# Altium PCB Watch.PcbDoc
Units mil, origin at the board's own origin, x right, y up, seen from the top; angles counter-clockwise.
Board outline 2050 x 2000 mil, 2 copper layers (Top Layer, Bottom Layer); 22 components, 22 nets, 98 pads, 6 vias.
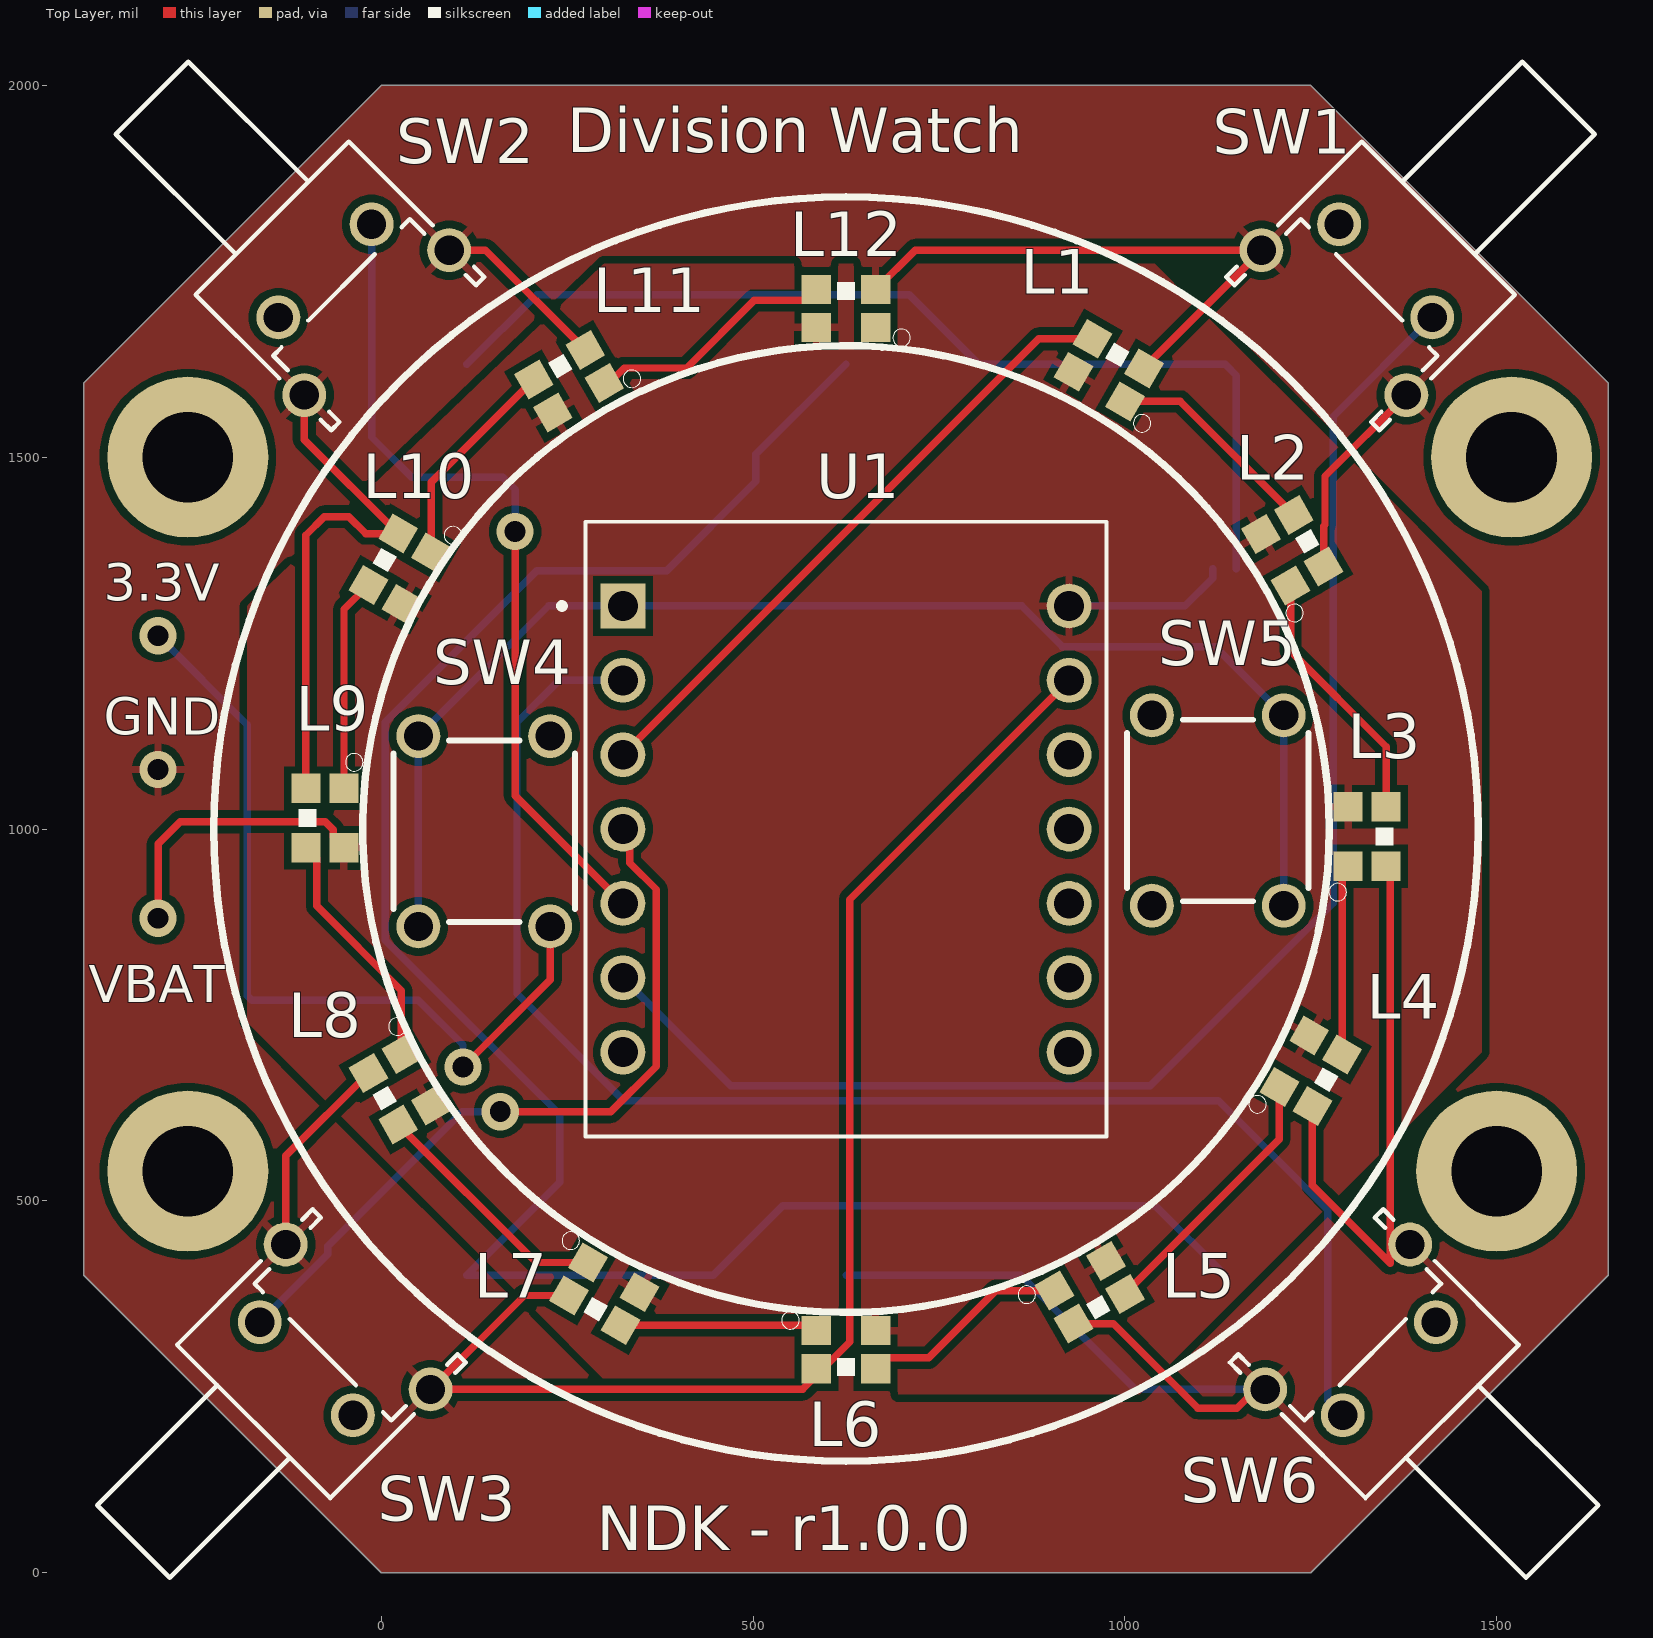
[diagram p0: Top Layer view]
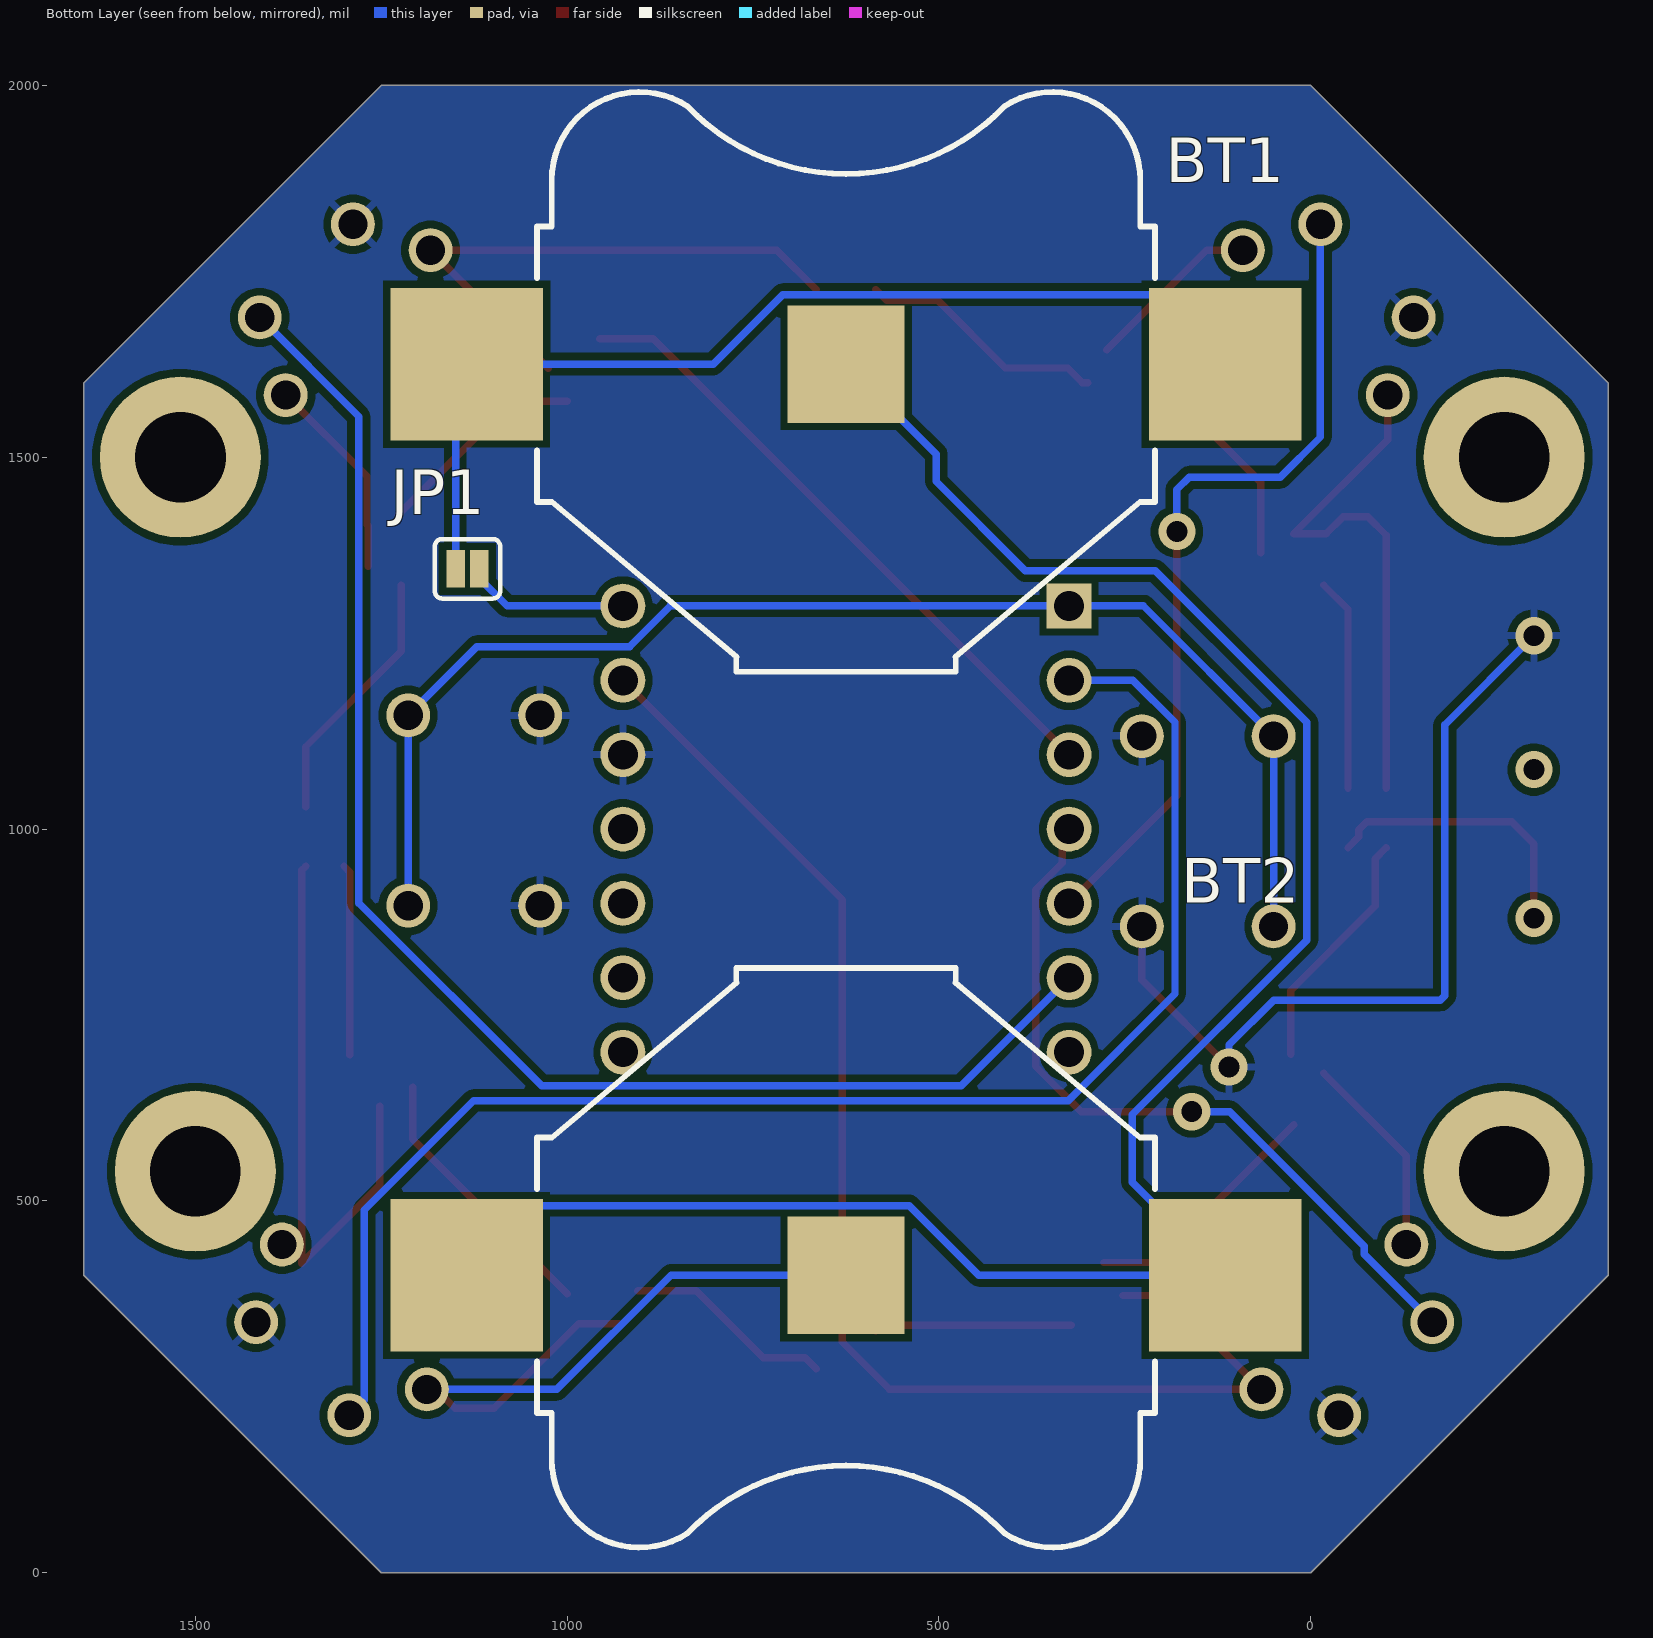
[diagram p1: Bottom Layer view, seen from below]
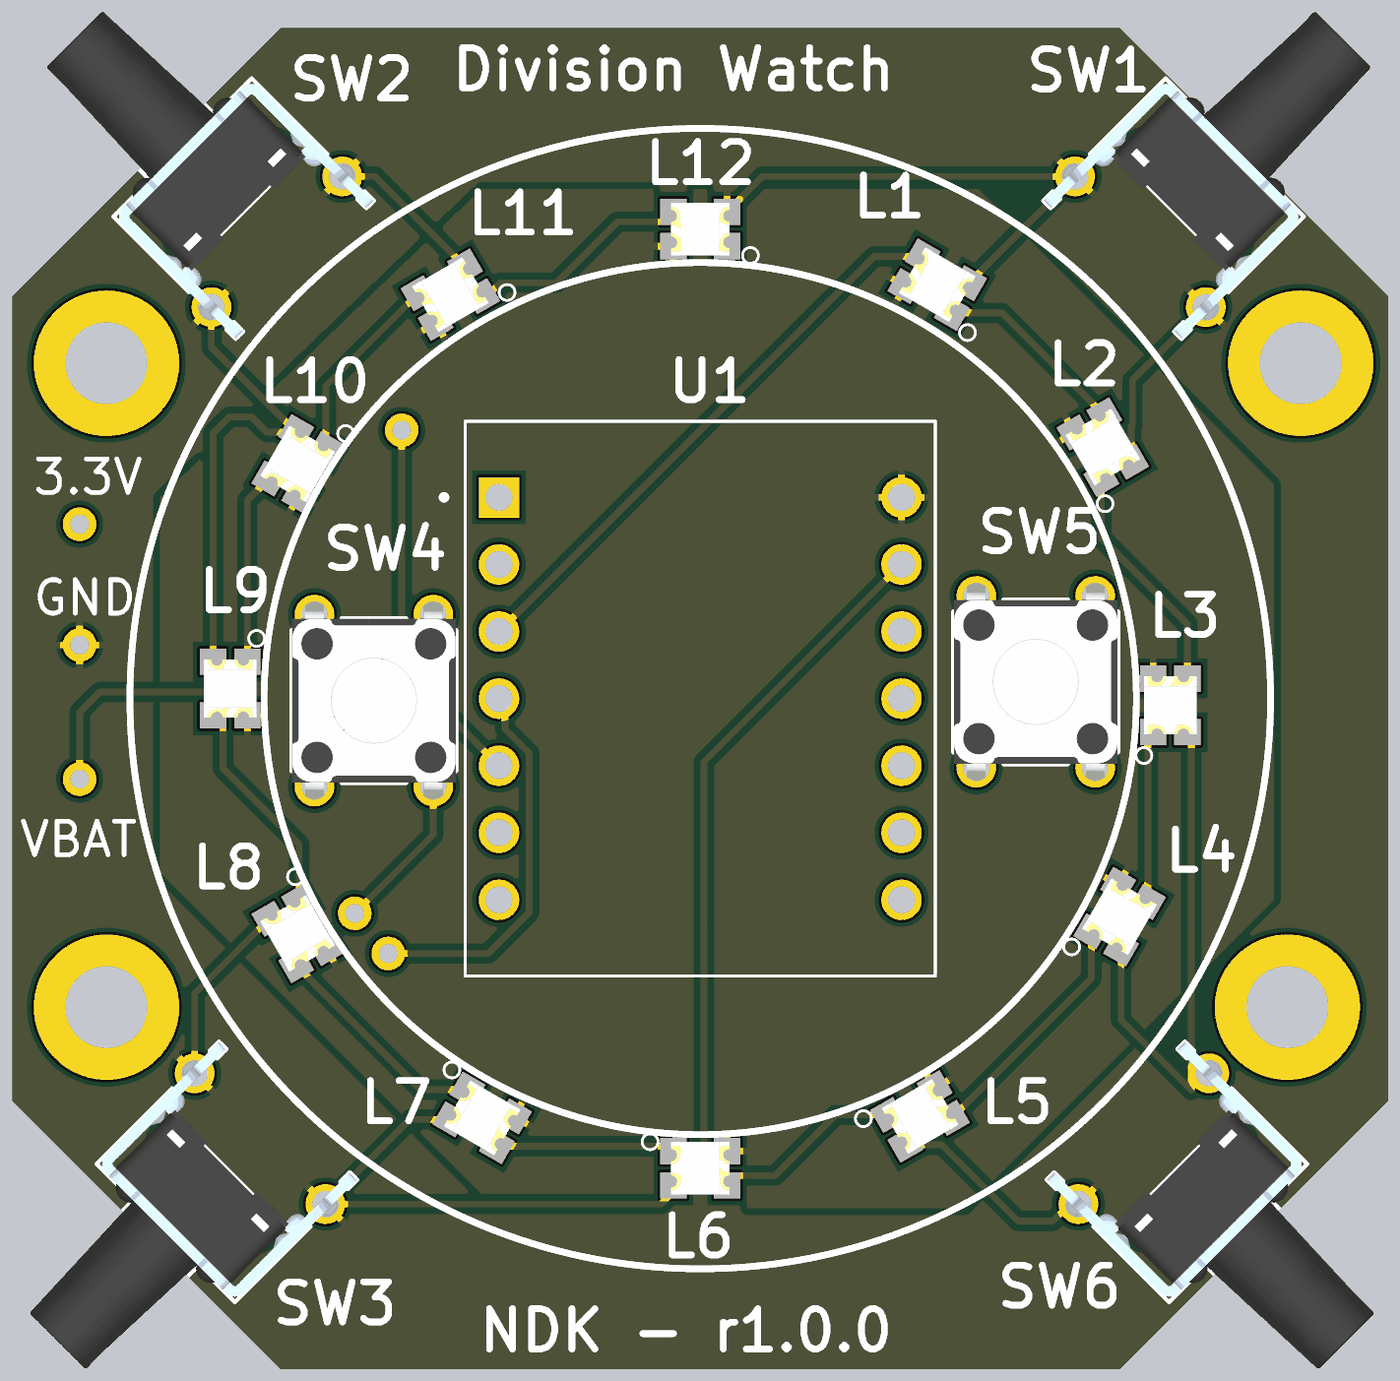
[diagram p2: 3D render of the assembled board from above, using the file's embedded part models]

## Layer stack, top to bottom
Top Solder: solder mask 0.4, Solder Resist, Dk 3.5
Top Layer: signal copper 1.4
Dielectric 1: dielectric 12.6, FR-4, Dk 4.8
Bottom Layer: signal copper 1.4
Bottom Solder: solder mask 0.4, Solder Resist, Dk 3.5

## Board outline
0,0 1250,0 1650,400 1650,1600 1250,2000 0,2000 -400,1600 -400,400

## Design rules (kind name [scope] priority, off if disabled: settings)
Clearance [All] p1: gap=10 ignorepadtopadclearanceinfootprint=FALSE except(0: Arc-Hole Track-Hole SMDPad-Hole THPad-Hole Via-Hole Fill-Hole Poly-Hole Region-Hole Text-Hole)
PolygonConnect [All] p1: connectstyle=Relief reliefconductorwidth=10 reliefentries=4 polygonreliefangle="90 Angle" airgapwidth=10
RoutingVias [All] p1: holewidth=28 width=50 viastyle="Through Hole" minholewidth=28 minwidth=50 maxholewidth=28 maxwidth=50
SolderMaskExpansion [All] p1: expansion=4 istentingtop=FALSE
Width [All] p1: maxlimit=10 minlimit=10 preferedwidth=10
30 further rules are at their usual default settings.

## Components (designator, comment, footprint, x,y, rotation, side; value= is the part's Value field where it differs from the comment)
BT1 "79523141" 79523141 625,1625 r180 bottom
BT2 "79523141" 79523141 625,400 r0 bottom
JP1 "NO Jumper" SMT-JUMPER_2_NO_SILK 1134,1350 r0 bottom
L1 "WS2812B-2020" WS2812B-2020 978.19,1617.14 r330 top
L2 "WS2812B-2020" WS2812B-2020 1225,1375 r300 top
L3 "WS2812B-2020" WS2812B-2020 1325.59,989.96 r270 top
L4 "WS2812B-2020" WS2812B-2020 1250,675 r240 top
L5 "WS2812B-2020" WS2812B-2020 952.6,377.18 r210 top
L6 "WS2812B-2020" WS2812B-2020 625,300 r180 top
L7 "WS2812B-2020" WS2812B-2020 300,375 r150 top
L8 "WS2812B-2020" WS2812B-2020 25,650 r120 top
L9 "WS2812B-2020" WS2812B-2020 -75.59,1014.96 r90 top
L10 "WS2812B-2020" WS2812B-2020 25,1350 r60 top
L11 "WS2812B-2020" WS2812B-2020 252.6,1602.18 r30 top
L12 "WS2812B-2020" WS2812B-2020 625,1700 r0 top
SW1 "431256083716" 4312560837x6 1375,1775 r135 top
SW2 "431256083716" 4312560837x6 -100,1775 r225 top
SW3 "431256083716" 4312560837x6 -125,250 r315 top
SW4 "430186043716" 4301x60437x6 138.58,997.05 r90 top
SW5 "430186043716" 4301x60437x6 1125,1025 r270 top
SW6 "431256083716" 4312560837x6 1380,250 r45 top
U1 "102010388" MODULE_102010388 625,1000 r0 top locked

## Footprints (in the part's own frame and the unit in brackets; to place one, negate y for a bottom-side part, rotate by r counter-clockwise, add the part's x,y. Pads: shape width x height; smd on the part's side, far side on the other; paste and mask are expansions set on the pad)
4301x60437x6 [mm] "6x6mm Tact Switch, THT version"
  round 1.5 hole 1: A1(-3.25,2.25) A2(3.25,2.25) B1(-3.25,-2.25) B2(3.25,-2.25)
  silkscreen extent -3.1,-3.1 3.1,3.1, body extent -3.95,-3.1 3.95,3.1, height 4.35
79523141 [mm] "Battery Holder, Battery Type: 2016,2020,2025,2032"
  rect 5.2x5.2 smd: 1(-12.95,0) 1(12.95,0)
  rect 4x4 smd: 2(0,0)
  silkscreen extent -10.55,-10.5 10.55,9.3, body extent -15.25,-10.5 15.25,9.3, height 4
4312560837x6 [mm] "6x6mm right angle Tact Switch with ground terminal, THT version"
  round 1.5 hole 1: 1(-2.25,0.875) 2(2.25,0.875) G1(-3.5,3.375) G2(3.5,3.375)
  silkscreen extent -3.7,-7.48 3.7,4.87, body extent -4.2,-7.48 4.2,4.87, height 7.25
MODULE_102010388 [mm]
  rect 1.53x1.53 / inner round 1.53 / far side rect 1.53x1.53 hole 1.02: 1(-7.62,7.62)
  round 1.53 hole 1.02: 2(-7.62,5.08) 3(-7.62,2.54) 4(-7.62,0) 5(-7.62,-2.54) 6(-7.62,-5.08) 7(-7.62,-7.62) 8(7.62,-7.62) 9(7.62,-5.08) 10(7.62,-2.54) 11(7.62,0) 12(7.62,2.54) 13(7.62,5.08) 14(7.62,7.62)
  silkscreen extent -9.8,-10.5 8.9,10.5
SMT-JUMPER_2_NO_SILK [mil]
  rect 25x50 smd paste+0: 1(-16,0) 2(16,0)
  silkscreen extent -44,-40 44,40
WS2812B-2020 [mm]
  rect 1x1 smd: 1(1.015,-0.65) 2(1.015,0.65) 3(-1.015,0.65) 4(-1.015,-0.65)
  silkscreen extent -0.3,-1.3 2.2,0.9, body extent -1.1,-1 1.1,1, height 0.84

## Part data
BT1 BT2: "WA-BCMC Battery Holder, SMT, battery type 2016,2020,2025,2032", Manufacturer="Wurth Elektronik", Operating Temperature Max=85°C, Operating Temperature Min=-30°C, Battery Type=2016,2020,2025,2032, Category="Battery Holders", ComponentLink1Description="Website Link", ComponentLink1URL=https://www.we-online.com/redexpert/article/79523141?ad, ComponentLink2Description="Datasheet Link", ComponentLink2URL=https://www.we-online.com/redexpert/spec/79523141?ad, Manufacturer Part Number=79523141, Match Code=WA-BCMC, Mount="Surface Mount", Packaging="Tape and Reel"
JP1: library part JUMPER-SMT_2_NO_SILK, Package=SMT-JUMPER_2_NO_SILK, DeviceName=_SILK, DeviceSetName=JUMPER-SMT_2_NO, GateName_1=G$1, LibraryName=SparkFun-Jumpers, SymbolName_1=SMT-JUMPER_2_NO
L1 L2 L3 L4 L5 L6 L7 L8 L9 L10 L11 L12: "Programmable LED; SMD; 2020; RGB; 2x2x0.84mm; 3.7Ã·5.3V; 2kHz", Package=None, Check_prices=https://www.snapeda.com/parts/WS2812B-2020/Worldsemi/view-part/?ref=eda, MF=WorldSemi, MP=WS2812B-2020, SnapEDA_Link=https://www.snapeda.com/parts/WS2812B-2020/Worldsemi/view-part/?ref=snap
SW1 SW2 SW3 SW6: "WS-TATU THT Tact Switch 6x6mm Right Angled Type with ground terminal, SPST-NO, 12VDC, 50mA, 160g", Manufacturer="Wurth Elektronik", Operating Temperature Max=85°C, Operating Temperature Min=-40°C, Rated Current=50mA, Rated Voltage (DC)=12VDC, Category="Tact Switches", Circuit=SPST-NO, ComponentLink1Description="Website Link", ComponentLink1URL=https://www.we-online.com/redexpert/article/431256083716?ad, ComponentLink2Description="Datasheet Link", ComponentLink2URL=https://www.we-online.com/redexpert/spec/431256083716?ad, Contact Material="Stainless Steel", Contact Plating=Silver, Height=8.35mm, Length=6mm, Manufacturer Part Number=431256083716, Match Code=WS-TATU, Mount="Through Hole", Operation Force=160g, Packaging=Bulk, Terminal Material="Copper Alloy", Terminal Plating=Silver, Washable=No, Width=6mm
SW4 SW5: "WS-TATV THT Tact Switch 6x6mm, SPST-NO, 12VDC, 50mA, 160g", Manufacturer="Wurth Elektronik", Operating Temperature Max=85°C, Operating Temperature Min=-40°C, Rated Current=50mA, Rated Voltage (DC)=12VDC, Category="Tact Switches", Circuit=SPST-NO, ComponentLink1Description="Website Link", ComponentLink1URL=https://www.we-online.com/redexpert/article/430186043716?ad, ComponentLink2Description="Datasheet Link", ComponentLink2URL=https://www.we-online.com/redexpert/spec/430186043716?ad, Contact Material="Stainless Steel", Contact Plating=Silver, Height=4.3mm, Length=6mm, Manufacturer Part Number=430186043716, Match Code=WS-TATV, Mount="Through Hole", Operation Force=160g, Packaging=Bulk, Terminal Material="Copper Alloy", Terminal Plating=Silver, Washable=No, Width=6mm
U1: "Seeeduino XIAO Development Board, Pre-Soldered [Seeed Studio] 102010388 Seeeduino XIAO Development Board, Pre-Soldered", Package=None, Availability="In Stock", Check_prices=https://www.snapeda.com/parts/102010388/Seeed+Technology+Co.%252C+Ltd/view-part/?ref=eda, MF="Seeed Technology Co., Ltd", MP=102010388, Price=None, Purchase-URL=https://pricing.snapeda.com/search/part/102010388/?ref=eda, SnapEDA_Link=https://www.snapeda.com/parts/102010388/Seeed+Technology+Co.%252C+Ltd/view-part/?ref=snap

## Free pads (board coordinates)
  round 216.54 hole 122.05: 1(-260,1500) 2(1520,1500) 3(1500,540) 4(-260,540)

## Via types
v1: diameter 50, hole 28, Top Layer to Bottom Layer, 6 vias

## Nets (pads, with @x,y where several pads share a name; then routed paths per layer and width w, separated by ;. In a path a pad name is that pad's centre, name@x,y a point inside that pad or via, vN(x,y) a via of type N, cw(c..) or ccw(c..) an arc to the next point about the centre after c; other vN are vias at no path point)
3V3: SW1.2 SW2.2 SW3.2 SW4.B1 SW4.B2 SW5.B1 SW5.B2 SW6.2 U1.12 | length 1118.8
  Top Layer w10: v1(110,680) 227.17,797.17 SW4.B1
  Bottom Layer w10: v1(-300,1260) -180,1140 -180,775.86 -174.14,770 50,770 110,710 v1(110,680)
GND: BT2.2 L1.2 L2.2 L3.2 L4.2 L5.2 L6.2 L7.2 L8.2 L9.2 L10.2 L11.2 L12.2 SW1.G1 SW1.G2 SW2.G1 SW2.G2 SW3.G1 SW3.G2 SW6.G1 SW6.G2 U1.13 | length 5853.1
  Top Layer w10: SW3.G1 -128.48,560.47 L8.2 ; SW2.G2 -103.48,1523.7 L10.2 -20.83,1397.4 -43.43,1420 -76.57,1420 -101.18,1395.39 L9.2 ; SW2.G1 140.25,1778.48 L11.2 ; L7.2 192.69,372.82 SW3.G2 566.55,246.52 630.28,310.24 630.28,905.28 U1.13 ; L12.2 717.85,1778.48 SW1.G2 1183.61,1777.91 1025.59,1619.89 L1.2 ; L5.2 984.65,335.04 1098.28,221.41 1150.75,221.41 1175.86,246.52 SW6.G1 ; L4.2 1252.18,520.84 1356.74,416.28 1356.74,944.44 L3.2 ; L2.2 1267.14,1407.05 1269.07,1408.98 1269.07,1474.2 SW1.G1
  Bottom Layer w10: BT2.2 860.3,400 1013.78,246.52 SW6.G1
  other v1: -300,1080
NetBT1_1: BT1.1 JP1.2 | length 1378.6
  Bottom Layer w10: BT1.1@115.16,1625 208.9,1718.74 709.95,1718.74 803.69,1625 1134.84,1625 1150,1609.84 JP1.2
NetBT1_2: BT1.2 BT2.1 | length 2830.1
  Bottom Layer w10: BT1.2 503.91,1503.91 503.91,1467.35 383.92,1347.35 209.38,1347.35 5.47,1143.44 5.47,850.65 240,616.12 240,524.84 115.16,400 446.31,400 540.05,493.74 1041.1,493.74 BT2.1@1134.84,400
NetL1_1: L1.1 L2.3 | length 290.4
  Top Layer w10: L1.1 1074.58,1575 L2.3
NetL1_3: L1.3 U1.3 | length 863
  Top Layer w10: U1.3 884.28,1659.28 L1.3
NetL2_1: L2.1 L3.3 | length 350.8
  Top Layer w10: L2.1 1222.82,1239.34 1351.18,1110.98 L3.3
NetL3_1: L3.1 L4.3 | length 256.4
  Top Layer w10: L4.3 1292.14,942.14 L3.1
NetL4_1: L4.1 L5.3 | length 364.3
  Top Layer w10: L5.3 1207.86,582.86 L4.1
NetL5_1: L5.1 L6.3 | length 283.7
  Top Layer w10: L6.3 679.65,289.09 736.34,289.09 826.61,379.36 L5.1
NetL6_1: L6.1 L7.3 | length 266.2
  Top Layer w10: L7.3 577.77,332.86 L6.1
NetL7_1: L7.1 L8.3 | length 332.2
  Top Layer w10: L8.3 208.27,417.14 L7.1
NetL8_1: L8.1 L9.3 | length 330.8
  Top Layer w10: L9.3 -86.5,960.31 -86.5,896.64 27.18,782.96 L8.1
NetL9_1: L9.1 L10.3 | length 286.9
  Top Layer w10: L9.1 -50,1295.33 L10.3
NetL10_1: L10.1 L11.3 | length 289.7
  Top Layer w10: L10.1 67.14,1466.31 L11.3
NetL11_1: L11.1 L12.3 | length 337.1
  Top Layer w10: L11.1 307.02,1600 327.02,1620 410.67,1620 501.58,1710.91 570.35,1710.91 L12.3
NetSW1_1: SW1.1 U1.6 | length 1959.6
  Bottom Layer w10: U1.6 470.12,654.88 1034.39,654.88 1280.04,900.53 1280.04,1554.76 SW1.1
NetSW2_1: SW2.1 U1.5 | length 1125
  Top Layer w10: v1(180,1400) 180,1045 U1.5
  Bottom Layer w10: SW2.1 -13,1527.22 41.16,1473.06 163.51,1473.06 180,1456.57 v1(180,1400)
NetSW3_1: SW3.1 U1.4 | length 1019.5
  Top Layer w10: v1(160,620) 308.81,620 370.12,681.31 370.12,918.69 333.92,954.88 333.92,991.08 U1.4
  Bottom Layer w10: SW3.1 -71.99,428.28 -71.99,438.79 109.22,620 v1(160,620)
NetSW4_A1: SW4.A1 SW4.A2 SW5.A1 SW5.A2 U1.1 | length 1808.8
  Bottom Layer w10: SW4.A1 SW4.A2 225,1300 U1.1 861.19,1300 916.08,1245.12 1121.42,1245.12 SW5.A1 SW5.A2
NetSW6_1: SW6.1 U1.2 | length 2025.8
  Bottom Layer w10: U1.2 239.19,1200 182.64,1143.44 182.64,778.56 326.31,634.88 1125.9,634.88 1273,487.78 1273,231.72 SW6.1
VBAT: JP1.1 L1.4 L2.4 L3.4 L4.4 L5.4 L6.4 L7.4 L8.4 L9.4 L10.4 L11.4 L12.4 U1.14 | length 603.2
  Top Layer w10: v1(-300,880) -300,980 -270.31,1009.69 -75.28,1009.69 -64.69,999.09 -64.69,989.69 L9.4
  Bottom Layer w10: U1.14 1080.5,1300 1118,1337.5 JP1.1
pads on no net: L12.1 U1.7 U1.8 U1.9 U1.10 U1.11

## Polygon pours and split planes (outlines as drawn)
GND on Top Layer "GND_L01_P004" (solid, pour order 4): -400,1600 0,2000 1250,2000 1650,1600 1650,400 1250,0 0,0 -400,400
VBAT on Top Layer "VBAT_L01_P000" (solid, pour order 0): 299.59,1760.41 300,1760 1040,1760 1480,1320 1480,700 1020,240 320,240 -180,740 -180,1300
3V3 on Bottom Layer "3V3_L02_P002" (solid, pour order 2): 1250,0 0,0 -400,400 -400,1600 0,2000 1250,2000 1650,1600 1650,400

## Silkscreen, mask and mechanical layers (free items; w line width, h text height)
Top Overlay:
  circle w10: c625,1000 r650
  circle w10: c625,1000 r850
  text "Division Watch" at 250,1910 h60
  text "3.3V" at -373,1307 h50
  text "GND" at -373,1127 h50
  text "VBAT" at -393,767 h50
  text "NDK - r1.0.0" at 290,30 h60

## Text inside footprints (layer, text, board x,y; h text height)
BT1: Bottom 3D Body "open landscape for no solder resist" at 1032.48,1168.31 h32
BT2: Bottom 3D Body "open landscape for no solder resist" at 217.52,856.69 h32 r180